# Allegro board board.brd
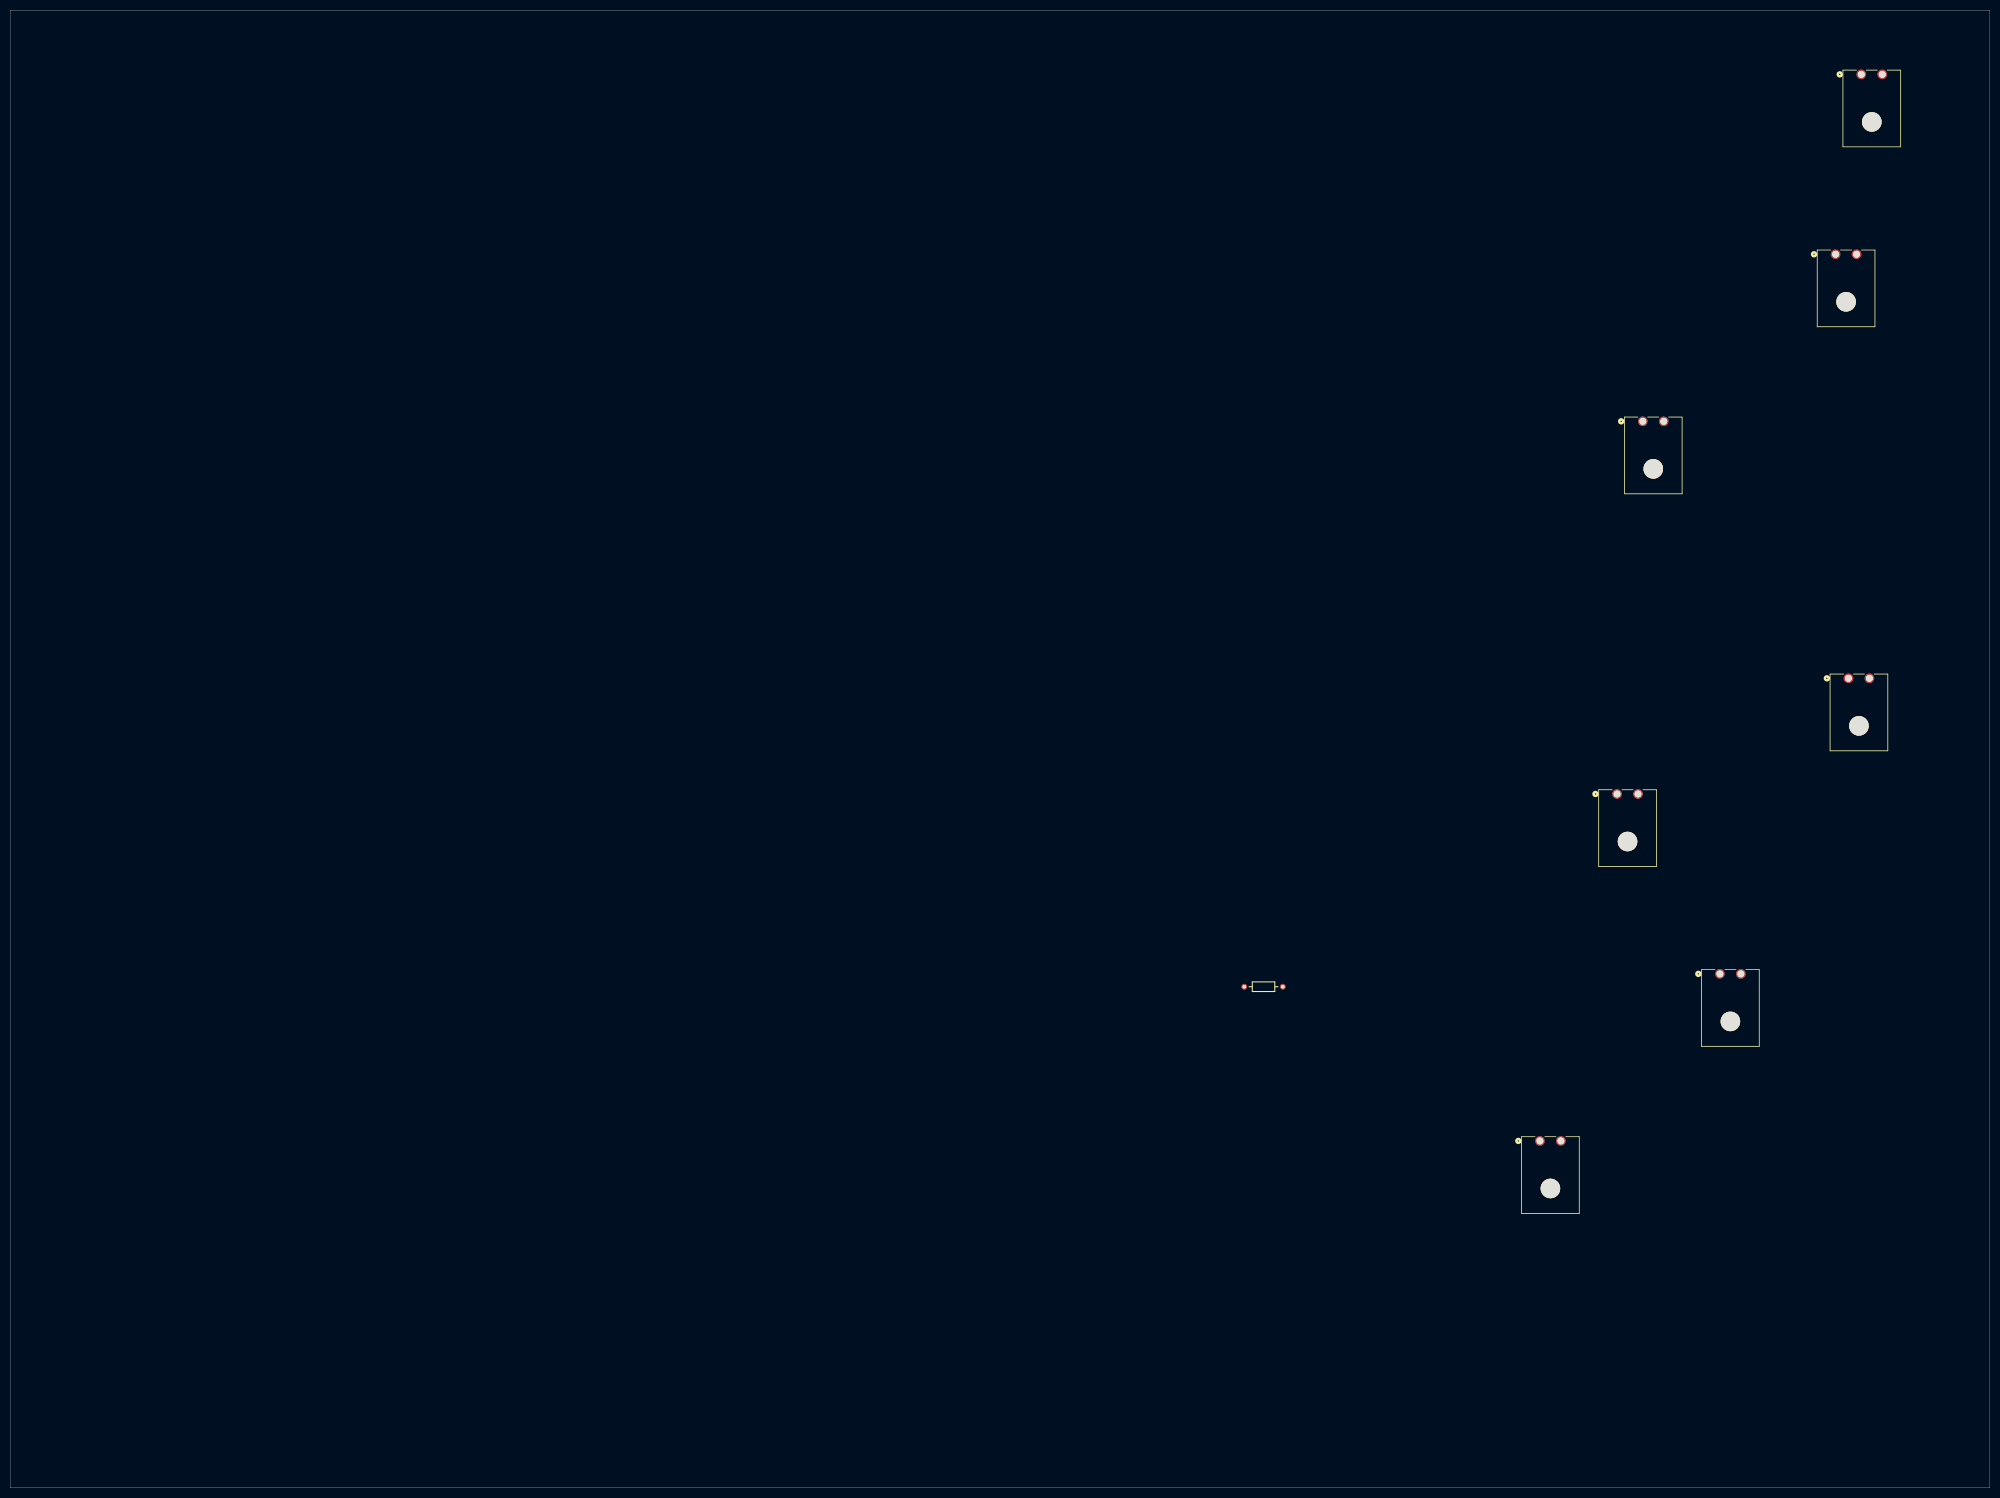
[diagram p0: board, top side]
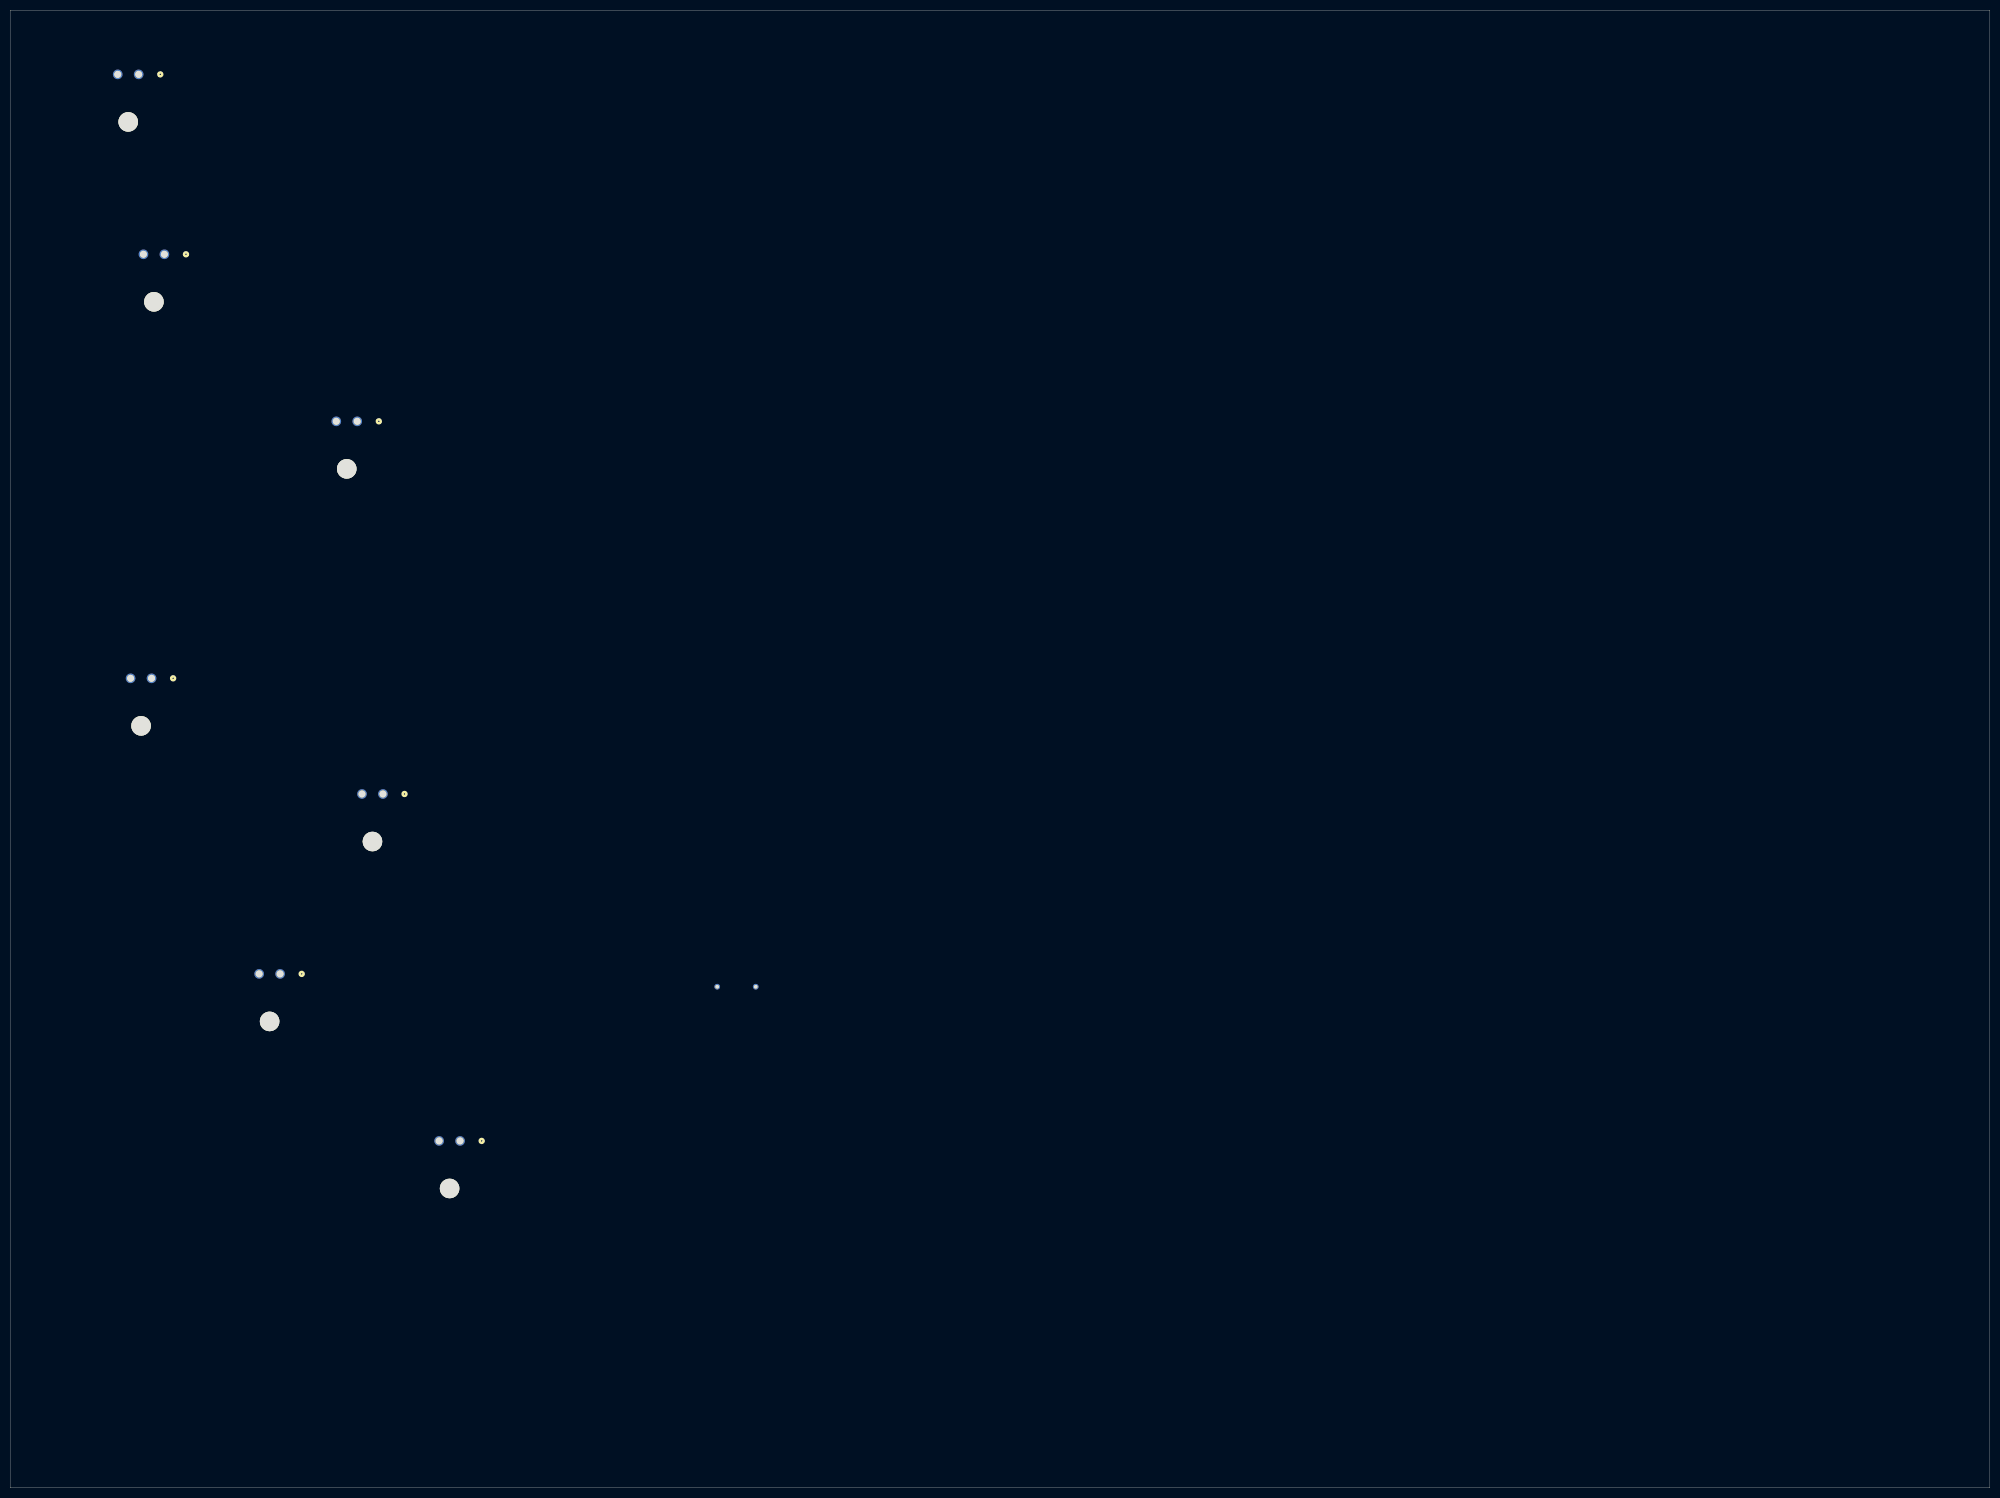
[diagram p1: board, bottom side, seen from below]

Outline 391.16 x 292.1 mm; copper layers: TOP, BOTTOM. Coordinates in mm from the lower left corner of the outline.
Outline path: 0,292.1 0,0 391.16,0 391.16,292.1 0,292.1

## Design rules (mm)
constraint set DEFAULT: min track width 0.127

## Placement (name value [footprint] x y rotation side)
J6  CON2  [CONN2_770966-2]  365.76 279.4 0 top
J8  CON2  [CONN2_770966-2]  360.68 243.84 0 top
J9  CON2  [CONN2_770966-2]  322.58 210.82 0 top
J10  CON2  [CONN2_770966-2]  363.22 160.02 0 top
J11  CON2  [CONN2_770966-2]  317.5 137.16 0 top
J12  CON2  [CONN2_770966-2]  337.82 101.6 0 top
J13  CON2  [CONN2_770966-2]  302.26 68.58 0 top
R1  10k  [AXRC05]  243.84 99.06 0 top

## Library data of the parts
J6 J8-J13 = CON2: User Part Number: PN; Tolerance: TOL
R1 = R

## Footprints (pads in the part's own frame, mm; a bottom-side part is the same pattern mirrored in y, then rotated)
AXRC05
  round 1.143 hole 0.711: 1(0,0) 2(7.62,0)
CONN2_770966-2
  round 3.861 hole 3.861 unplated: (2.07,-9.398)
  round 1.905 hole 1.397: 1(0,0) 2(4.14,0)

## Nets
GND: J6.2 J8.1 J10.1 J12.1
VCC: J9.2 J11.2 J13.2
N03605: J8.2
N03840: J9.1
N03861: J10.2
N04056: J6.1 R1.2
N04124: R1.1
N04558: J11.1
N04576: J12.2

Pads without a net: J13 1
